# Altium PCB HallMode.PcbDoc
Units mil, origin at the board's own origin, x right, y up, seen from the top; angles counter-clockwise.
Board outline 5026.91 x 4685 mil, 2 copper layers (Top Layer, Bottom Layer); 44 components, 32 nets, 157 pads, 51 vias.
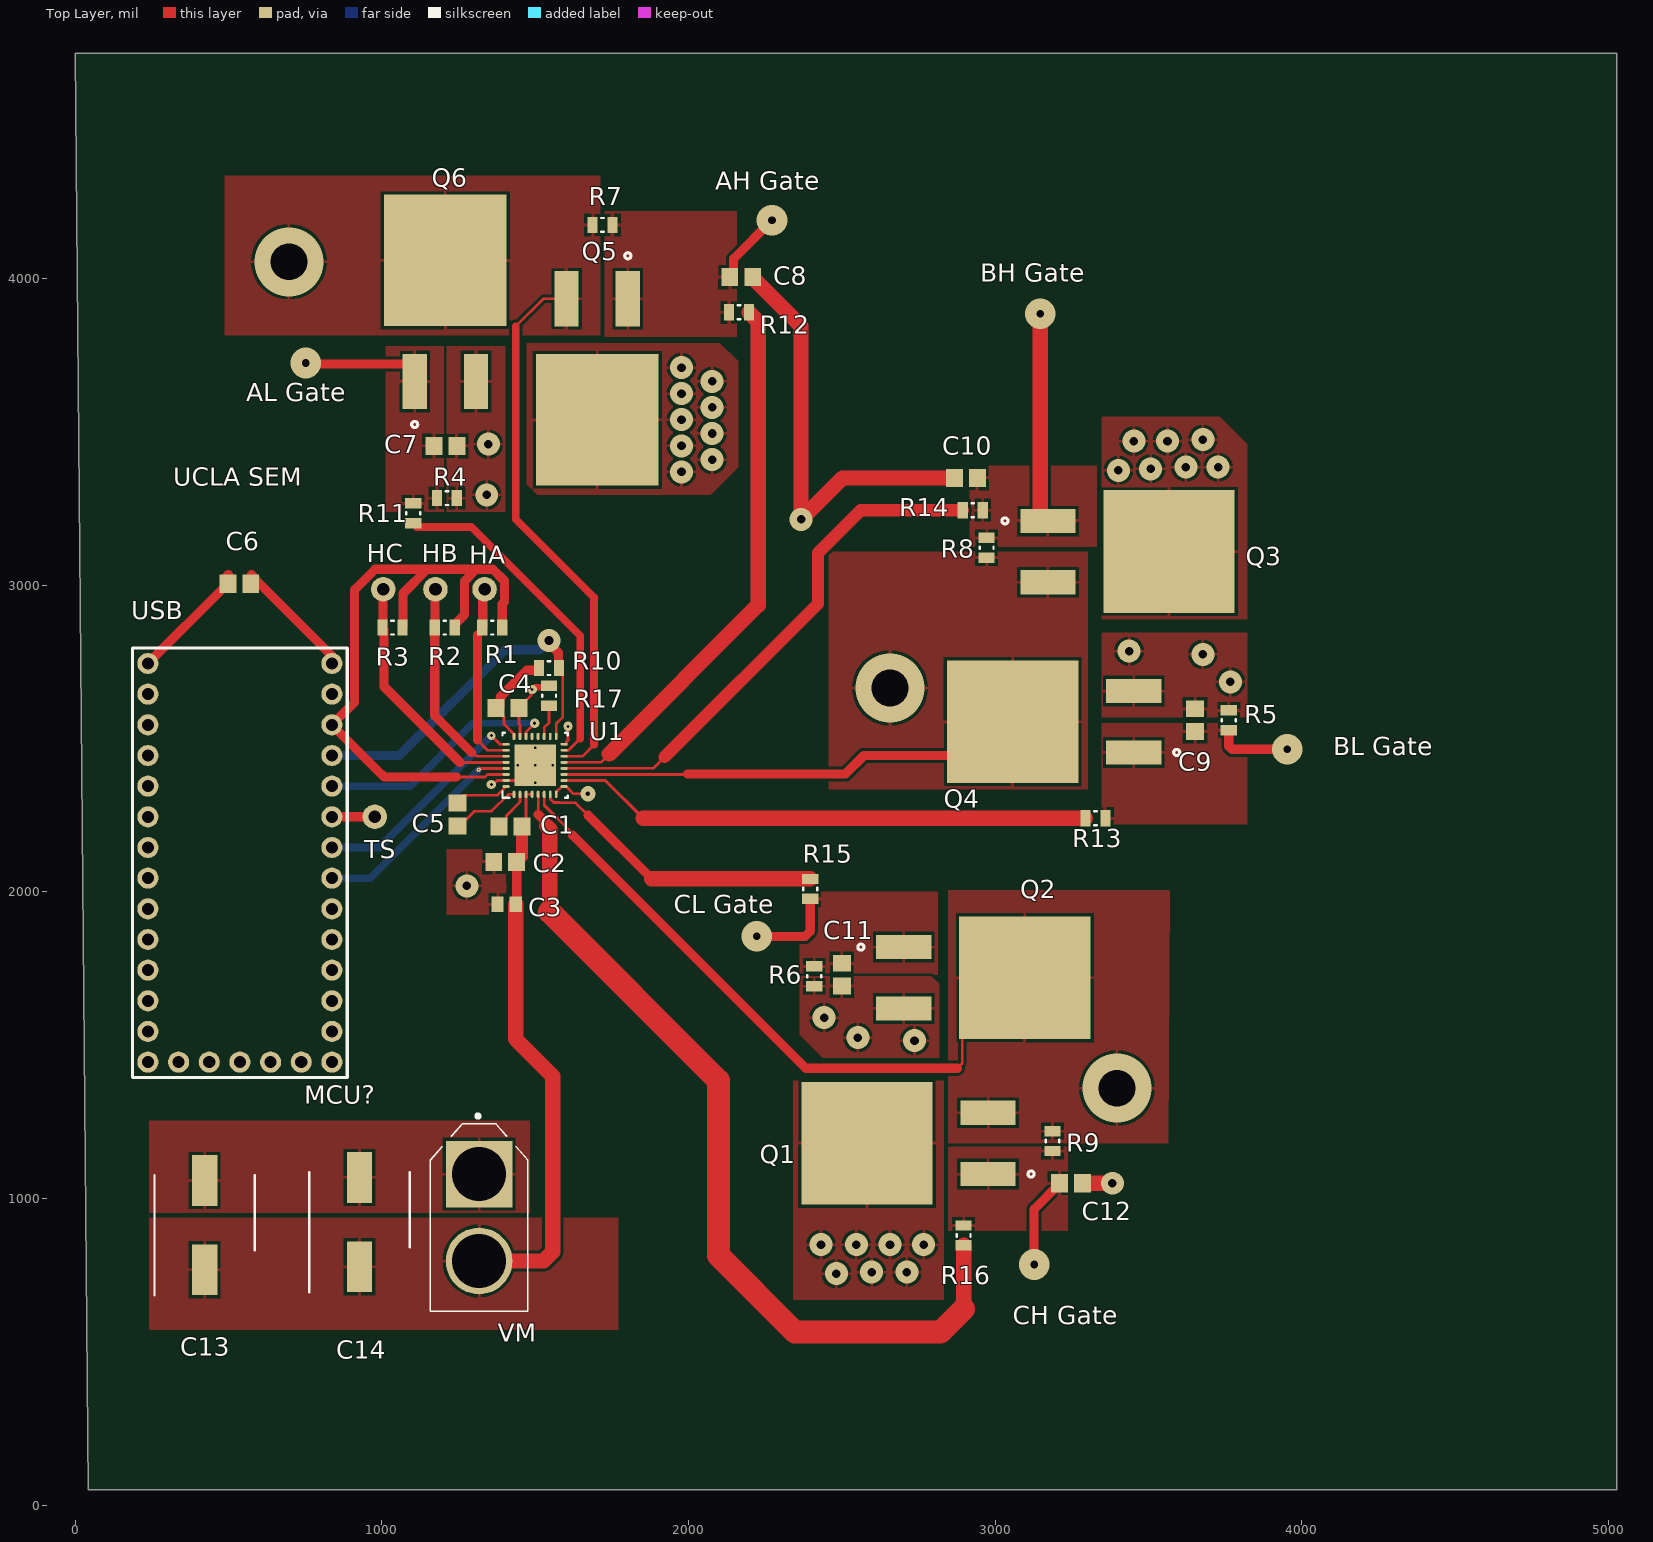
[diagram p0: Top Layer view]
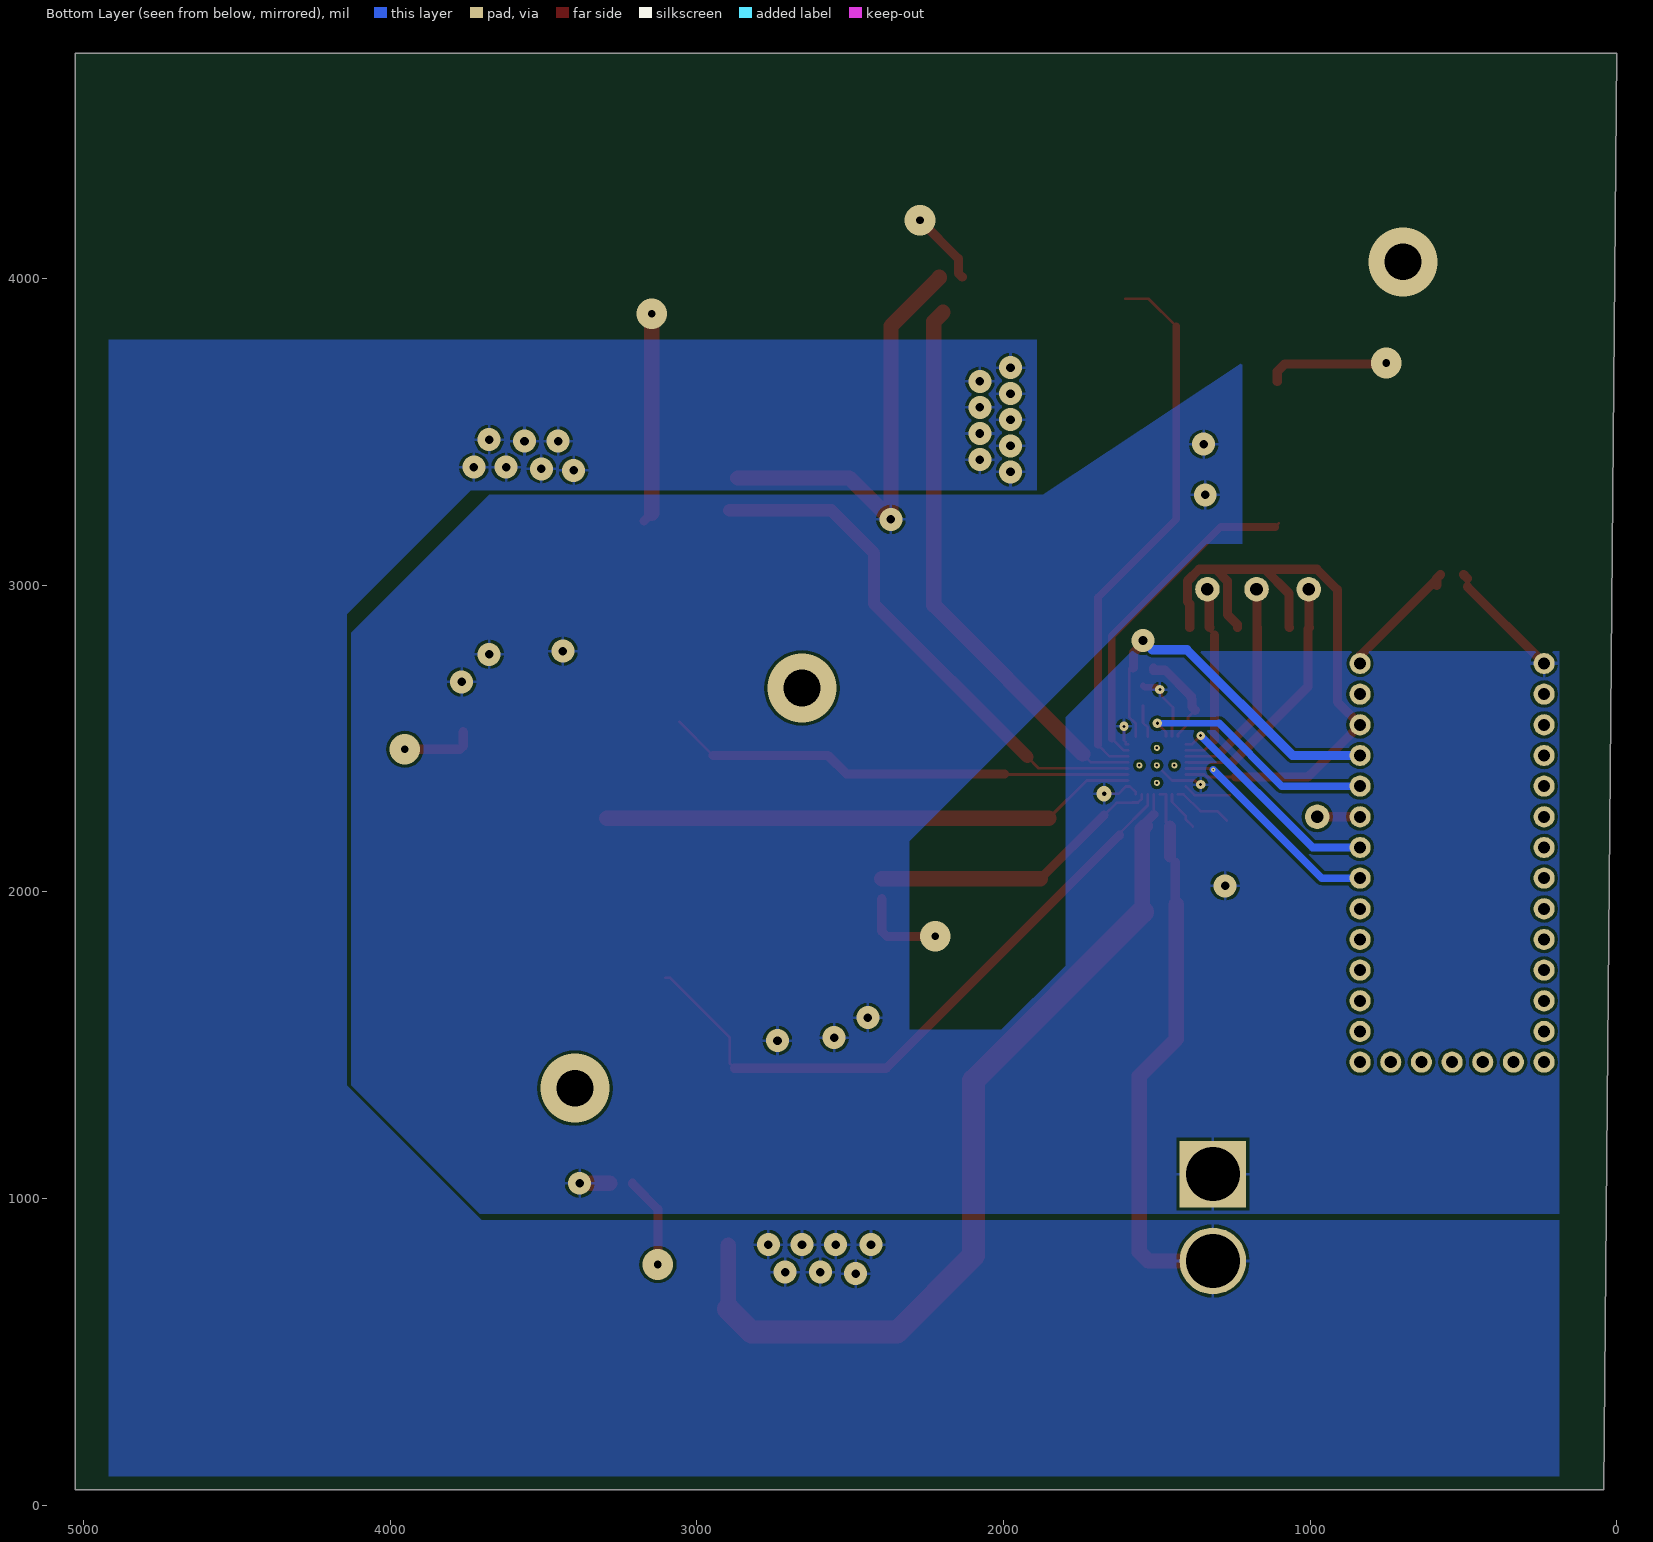
[diagram p1: Bottom Layer view, seen from below]

## Layer stack, top to bottom
Top Solder: solder mask 0.4, Solder Resist, Dk 3.5
Top Layer: signal copper 1.4
Dielectric 1: dielectric 12.6, FR-4, Dk 4.8
Bottom Layer: signal copper 1.4
Bottom Solder: solder mask 0.4, Solder Resist, Dk 3.5

## Board outline
0,4735 5026.91,4735 5026.91,1035 5026.91,50 41.91,50

## Design rules (kind name [scope] priority, off if disabled: settings)
Clearance [All] p1: gap=10 ignorepadtopadclearanceinfootprint=TRUE except(0: Arc-Hole Track-Hole SMDPad-Hole THPad-Hole Via-Hole Fill-Hole Poly-Hole Region-Hole Text-Hole)
PolygonConnect [All] p1: connectstyle=Relief reliefconductorwidth=10 reliefentries=4 polygonreliefangle="90 Angle" airgapwidth=10
RoutingVias [All] p1: holewidth=28 width=50 viastyle="Through Hole" minholewidth=28 minwidth=50 maxholewidth=28 maxwidth=50
SolderMaskExpansion [All] p1: expansion=4 istentingtop=FALSE
Width [All] p1: maxlimit=10000 minlimit=5 preferedwidth=30 bottomlayer_minwidth=10 minimp=50.000000 maximp=50.000000 favimp=50.000000
30 further rules are at their usual default settings.

## Components (designator, comment, footprint, x,y, rotation, side; value= is the part's Value field where it differs from the comment)
C1 "1uF" CAPC2013X135X45ML10T25 1419.7,2212.79 r0 top
C2 "0.1uF" CAPC2013X135X45ML10T25 1402.1,2097.79 r0 top
C3 "10uF" CAPC2013X135X50LL10T20 1406.91,1960 r0 top
C4 "1uF" CAPC2013X135X45ML10T25 1410,2600 r180 top
C5 "47nF" CAPC2013X135X45ML10T25 1246.91,2252.6 r270 top
C6 "0.1uF" CAPC2013X135X45ML10T25 535,3005 r180 top
C7 "0.1uF" CAPC2013X135X45ML10T25 1206.91,3454.48 r180 top
C8 "0.1uF" CAPC2013X135X45ML10T25 2171.91,4005 r0 top
C9 "0.1uF" CAPC2013X135X45ML10T25 3651.91,2560 r270 top
C10 "0.1uF" CAPC2013X135X45ML10T25 2904.32,3350 r180 top
C11 "0.1uF" CAPC2013X135X45ML10T25 2500,1730 r90 top
C12 "0.1uF" CAPC2013X135X45ML10T25 3246.91,1050 r0 top
C13 "EEE-TC1V101P" CAPAE830X1050N 421.91,913.27 r90 top
C14 "EEE-TC1V101P" CAPAE830X1050N 926.91,923.27 r90 top
HA "Hall Sensor" "A single pin" 1334.7,2987.21 r270 top (schematic designator "HALL A")
HB "Hall Sensor" "A single pin" 1174.7,2987.21 r270 top (schematic designator "HALL B")
HC "Hall Sensor" "A single pin" 1004.7,2987.21 r270 top (schematic designator "HALL C")
MCU? "teensy3.2" teensy3.2 836.91,2745 r270 top
Q1 "INFINEON" MOSFET-2 2761.91,1180 r0 top
Q2 "INFINEON" MOSFET-2 2916.91,1720 r180 top
Q3 "INFINEON" MOSFET-2 3386.91,3110 r180 top
Q4 "INFINEON" MOSFET-2 3236.91,2555 r0 top
Q5 "INFINEON" MOSFET-2 1701.91,3719.48 r90 top
Q6 "INFINEON" MOSFET-2 1206.91,3879.48 r270 top
R1 "CRCW08050000Z0EA" RESC2013X50X30LL20T20 1359.7,2862.21 r180 top
R2 "CRCW08050000Z0EA" RESC2013X50X30LL20T20 1204.7,2862.21 r180 top
R3 "CRCW08050000Z0EA" RESC2013X50X30LL20T20 1034.7,2862.21 r180 top
R4 "CRCW08050000Z0EA" RESC2013X50X30LL20T20 1211.91,3284.48 r180 top
R5 "CRCW08050000Z0EA" RESC2013X50X30LL20T20 3761.91,2560 r90 top
R6 "CRCW08050000Z0EA" RESC2013X50X30LL20T20 2410,1725 r90 top
R7 "CRCW08050000Z0EA" RESC2013X50X30LL20T20 1719.43,4175 r0 top
R8 "CRCW08050000Z0EA" RESC2013X50X30LL20T20 2971.91,3122.52 r90 top
R9 "CRCW08050000Z0EA" RESC2013X50X30LL20T20 3186.91,1187.48 r270 top
R10 "CRCW08050000Z0EA" RESC2013X50X30LL20T20 1545,2730 r180 top
R11 "CRCW08050000Z0EA" RESC2013X50X30LL20T20 1101.91,3235 r270 top
R12 "CRCW08050000Z0EA" RESC2013X50X30LL20T20 2164.43,3890 r0 top
R13 "CRCW08050000Z0EA" RESC2013X50X30LL20T20 3326.91,2240 r180 top
R14 "CRCW08050000Z0EA" RESC2013X50X30LL20T20 2926.91,3245 r180 top
R15 "CRCW08050000Z0EA" RESC2013X50X30LL20T20 2396.91,2010 r90 top
R16 "CRCW08050000Z0EA" RESC2013X50X30LL20T20 2896.91,880 r270 top
R17 "CRCW08050000Z0EA" RESC2013X50X30LL20T20 1545,2640 r90 top
TS "" "A single pin" 976.91,2245 r180 top
U1 "DRV8320HRTVR" RTV0032E 1499.7,2412.79 r90 top value=Value
VM "Battery" *AMASS_XT60-M 1316.91,938.27 r270 top

## Footprints (in the part's own frame and the unit in brackets; to place one, negate y for a bottom-side part, rotate by r counter-clockwise, add the part's x,y. Pads: shape width x height; smd on the part's side, far side on the other; paste and mask are expansions set on the pad)
*AMASS_XT60-M [mm]
  round 5.516 hole 4.5: 1(3.6,0)
  rect 5.516x5.516 hole 4.5: 2(-3.6,0)
  silkscreen extent -8.55,-4.05 7.75,4.05
"A single pin" [mil]
  round 80 hole 40.94: 0(0,0)
CAPAE830X1050N [mm]
  rect 4.2x2.1 smd: 1(-3.7,0) 2(3.7,0)
  silkscreen extent -5.8,-4.15 4.15,4.15, body extent -5,-4.25 5,4.25, height 10.5
CAPC2013X135X45ML10T25 [mm] "Chip Capacitor, 2-Leads, Body 2.10x1.35mm, IPC Low Density"
  rect 1.4x1.5 smd: 1(-0.95,0) 2(0.95,0)
  body extent -1.05,-0.67 1.05,0.67, height 1.35
CAPC2013X135X50LL10T20 [mm] "Chip Capacitor, 2-Leads, Body 2.00x1.25mm, IPC High Density"
  rect 1x1.3 smd: 1(-0.75,0) 2(0.75,0)
  body extent -1.05,-0.67 1.05,0.68, height 1.35
MOSFET-2 [mil]
  rect 180x78.74 smd: 1(215,-100) 3(215,100)
  rect 428.35x400 smd: 2(-180,0)
  silkscreen extent 345,-110 365,-90
RESC2013X50X30LL20T20 [mm] "Chip Resistor, 2-Leads, Body 2.00x1.25mm, IPC High Density"
  rect 0.85x1.35 smd: 1(-0.825,0) 2(0.825,0)
  silkscreen extent -0.1,-0.58 0.1,0.58, body extent -1.1,-0.72 1.1,0.72, height 0.5
RTV0032E [mm]
  oval 0.6x0.24 smd paste+0 mask+0.051: 1(-2.4,1.75) 2(-2.4,1.25) 3(-2.4,0.75) 4(-2.4,0.25) 5(-2.4,-0.25) 6(-2.4,-0.75) 7(-2.4,-1.25) 8(-2.4,-1.75) 17(2.4,-1.75) 18(2.4,-1.25) 19(2.4,-0.75) 20(2.4,-0.25) 21(2.4,0.25) 22(2.4,0.75) 23(2.4,1.25) 24(2.4,1.75)
  oval 0.24x0.6 smd paste+0 mask+0.051: 9(-1.75,-2.4) 10(-1.25,-2.4) 11(-0.75,-2.4) 12(-0.25,-2.4) 13(0.25,-2.4) 14(0.75,-2.4) 15(1.25,-2.4) 16(1.75,-2.4) 25(1.75,2.4) 26(1.25,2.4) 27(0.75,2.4) 28(0.25,2.4) 29(-0.25,2.4) 30(-0.75,2.4) 31(-1.25,2.4) 32(-1.75,2.4)
  rect 3.45x3.45 smd paste-1.712 mask+0.051: 33(0,0)
  round 0.5 hole 0.203 mask+0.051: ""(-1.45,0) ""(0,1.45) ""(0,0) ""(0,-1.45) ""(1.45,0)
  silkscreen extent -2.7,-2.7 2.7,2.7, body extent 0,0 0.25,0.25, height 0.25
teensy3.2 [mm]
  round 1.75 hole 1: 1(0,0) 2(2.54,0) 3(5.08,0) 4(7.62,0) 5(10.16,0) 6(12.7,0) 7(15.24,0) 8(17.78,0) 9(20.32,0) 10(22.86,0) 11(25.4,0) 12(27.94,0) 13(30.48,0) 14(33.02,0) 15(33.02,-2.54) 16(33.02,-5.08) 17(33.02,-7.62) 18(33.02,-10.16) 19(33.02,-12.7) 20(33.02,-15.24) 21(30.48,-15.24) 22(27.94,-15.24) 23(25.4,-15.24) 24(22.86,-15.24) 25(20.32,-15.24) 26(17.78,-15.24) 27(15.24,-15.24) 28(12.7,-15.24) 29(10.16,-15.24) 30(7.62,-15.24) 31(5.08,-15.24) 32(2.54,-15.24) 33(0,-15.24)
  silkscreen extent -1.27,-16.51 34.29,1.27

## Part data
C1 C4 C5: library part CMP-2000-04946-1, "Multilayer Ceramic Capacitor, 1 uF, +/- 10%, 16 V, -55 to 125 degC, 0805 (2012 Metric), RoHS, Tape and Reel", Capacitance=1µF, Case Size/Dimension=0805, Dielectric=X7R, Manufacturer=Murata, Package Description="2-Pin Surface Mount Device, Body 2 x 1.25 mm", Package Reference=805, Rated Voltage=16V, Tolerance (%)=±10%, Datasheet URL=https://datasheet.ciiva.com/34302/1858922-34302874.pdf, Datasheet Version=Mar-08, Manufacturer URL=http://www.murata.com/
C2 C6 C7 C8 C9 C10 C11 C12: library part CMP-2100-03644-1, "Chip Capacitor, 0.1 uF, +/- 10%, 50 V, -55 to 125 degC, 0805 (2012 Metric), RoHS, Tape and Reel", Capacitance=100nF, Case Code (Imperial)=0805, Case Code (Metric)=2012, Dielectric=X7R, Dielectric Material=Ceramic, Insulation Resistance=10GR, Manufacturer=Murata, Max Operating Temperature=125degC, Min Operating Temperature=-55degC, Package Description="2-Pin Surface Mount Device, Body 2 x 1.25 mm", Package Quantity=1, Tolerance=10%, Voltage=50V, Case/Package=0805, Datasheet URL=http://psearch.en.murata.com/capacitor/product/GRM21BR71H104KA01%23.pdf, Datasheet Version=42675.0, Depth=1.25mm, Height=1.25mm, Lead Free=LeadFree, Length=2mm, Manufacturer URL=http://www.murata.com/, Material=Ceramic, Mount=SurfaceMount, Number of Pins=2, Package Reference=0805, Packaging=TapeandReel, Radiation Hardening=No, REACH SVHC=Unknown, RoHSCompliant=true, Termination=SMD/SMT, Thickness=0.053inch, Voltage Rating=50V, Voltage Rating (DC)=50V, Width=0.049inch
C3: library part CMP-2007-03453-1, Manufacturer=Murata, Part Number=GRM21BR61C106KE15L
C13 C14: "Capacitor", Manufacturer_Name=Panasonic, Mouser Part Number=667-EEE-TC1V101P, Arrow Part Number=EEE-TC1V101P, Arrow Price/Stock=https://www.arrow.com/en/products/eee-tc1v101p/panasonic, Datasheet Link=https://www.mouser.in/datasheet/2/315/ABA0000C678-951953.pdf, Height=10.5mm, Manufacturer_Part_Number=EEE-TC1V101P, Mouser Price/Stock=https://www.mouser.com/Search/Refine.aspx?Keyword=667-EEE-TC1V101P
R1 R2 R3 R4 R5 R6 R7 R8 R9 R10 R11 R12 R13 R14 R15 R16 R17: library part CMP-2001-04896-1, Manufacturer="Vishay Dale", Part Number=CRCW08050000Z0EA
TS: library part "Hall Sensor"
U1: "No Description Available", Manufacturer="Texas Instruments", Copyright="Copyright (C) 2018 Accelerated Designs. All rights reserved", PartNumber=DRV8320HRTVR, RefDes=RefDes, Type=DEV

## Via types
v1: diameter 75, hole 28, Top Layer to Bottom Layer, 35 vias
v2: diameter 100, hole 25, Top Layer to Bottom Layer, 6 vias
v3: diameter 30, hole 10, Top Layer to Bottom Layer, 4 vias
v4: diameter 225, hole 120, Top Layer to Bottom Layer, 3 vias
v5: diameter 50, hole 15, Top Layer to Bottom Layer, 1 vias
v6: diameter 28, hole 10, Top Layer to Bottom Layer, 1 vias
v7: diameter 15, hole 5, Top Layer to Bottom Layer, 1 vias

## Nets (pads, with @x,y where several pads share a name; then routed paths per layer and width w, separated by ;. In a path a pad name is that pad's centre, name@x,y a point inside that pad or via, vN(x,y) a via of type N, cw(c..) or ccw(c..) an arc to the next point about the centre after c; other vN are vias at no path point)
+3.3: MCU?.3 R1.1 R2.1 R3.1 U1.30 | length 2243.5
  Top Layer w9: 999.34,2382.57 1007.41,2374.5 ; 1242.41,2374.5 1336.41,2374.5 1344.71,2382.8 1397.54,2382.8 1398,2383.26 U1.30
  Top Layer w30: 999.34,2382.57 MCU?.3 911.07,2619.15 911.07,2985.5 977.78,3052.21 1147.78,3052.21 ; 1007.41,2374.5 1242.41,2374.5 ; R3.1 1068.91,2863.95 1068.91,2973.35 1147.78,3052.21 ; R2.1 1237.18,2872.06 1269.7,2904.57 1269.7,3014.14 1307.78,3052.21 ; R1.1 1392.18,2939.34 1399.7,2946.86 1399.7,3014.14 1361.62,3052.21 1307.78,3052.21 ; 1147.78,3052.21 1307.78,3052.21
+5: C6.1 MCU?.1 | length 393.8
  Top Layer w30: 574.32,3035 586.87,3022.44 C6.1@586.87,3000.04 ; C6.1@586.87,3020.04 MCU?.1@836.91,2770
GND: C2.1 C3.1 C4.1 C6.2 C7.1 C8.2 C9.1 C10.2 C11.1 C12.2 C13.2 C14.2 MCU?.33 Q2.3 Q4.3 Q6.3 R4.1 R5.2 R6.1 R17.2 U1.8 U1.9 U1.16 U1.23 U1.31 U1.33 VM.2 | length 2452.1
  Top Layer w9: v3(1356.91,2350) 1362.6,2350 1376.17,2363.57 U1.31 1450.49,2363.57 U1.33@1482.49,2395.57 ; U1.23 1450.49,2543.18 1447.4,2546.27 C4.1 1447.4,2601.97 1485.98,2640.55 1485.98,2655.98 v3(1490,2660) ; U1.8 1568.6,2325.39 1587.1,2343.89 U1.9 1601.28,2343.89 1625.17,2320 v5(1671.91,2320) ; U1.16 1601.15,2481.68 1601.36,2481.89 1601.36,2488.86 1606.91,2494.41 v3(1606.91,2540)
  Top Layer w20: v3(1490,2660) 1492.71,2660 1500.04,2667.34 1539.86,2667.34 R17.2
  Top Layer w30: MCU?.33 C6.2@486.95,2995.04 ; C6.2@486.95,3022.44 499.51,3035
  Top Layer w50: C8.2 2209.32,4003.03 2366.91,3845.43 v1(2366.91,3215) 2501.91,3350 C10.2 ; C12.2 v1(3381.91,1050)
  other v1: 2736.91,1515 2551.91,1525 2441.91,1590 1276.91,2020 3766.91,2685 3676.91,2775 3436.91,2785 1341.91,3295 1346.91,3460
NetC1_1: C1.1 U1.2 | length 133.8
  Top Layer w9: C1.1 1405.36,2235.85 1405.36,2247.86 1450.49,2292.99 U1.2
NetC4_2: C4.2 R10.2 U1.24 | length 324.6
  Top Layer w9: C4.2@1374.7,2592.79 1397.76,2569.73 1397.76,2547.41 1430.8,2514.36 U1.24
  Top Layer w30: C4.2@1374.7,2592.79 1385.16,2603.24 1385.16,2630 1387.26,2632.1 1387.26,2637.26 1472.79,2722.79 1510.79,2722.79 R10.2@1510.79,2730
NetC5_1: C5.1 U1.32 | length 155.3
  Top Layer w9: C5.1@1261.91,2315 1262.41,2315.5 1376.82,2315.5 U1.32
NetC5_2: C5.2 U1.1 | length 194.4
  Top Layer w9: C5.2@1271.91,2232.6 1302.76,2263.44 1357.72,2263.44 1412.58,2318.3 U1.1
NetC7_2: C7.2 Q6.1 R4.2 R11.1 | length 399.4
  Top Layer w30: v2(751.91,3725) 755.12,3721.8 1082.54,3721.8 1106.91,3697.43 Q6.1
NetC8_1: C8.1 Q5.1 R7.2 R12.1 | length 241.9
  Top Layer w30: C8.1 2147.07,4017.56 2147.07,4065.16 v2(2271.91,4190)
NetC9_2: C9.2 Q4.1 R5.1 R13.1 | length 241.7
  Top Layer w30: R5.1@3761.91,2522.52 3761.91,2475 3771.91,2465 v2(3951.91,2465)
NetC10_1: C10.1 Q3.1 R8.2 R14.1 | length 685.4
  Top Layer w30: Q3.1@3146.91,3235 Q3.1
  Top Layer w50: Q3.1@3146.91,3235 v2(3146.91,3885)
NetC11_2: C11.2 Q2.1 R6.2 R15.1 | length 287.6
  Top Layer w30: v2(2221.91,1855) 2380,1855 2396.91,1871.91 R15.1
NetC12_1: C12.1 Q1.1 R9.2 R16.1 | length 299.2
  Top Layer w30: v2(3126.91,785) 3126.91,965.43 3209.51,1048.03 C12.1
"NetHALL A_0": HA.0 R1.2 U1.26 | length 608.6
  Top Layer w9: 1311.91,2495 1344.91,2462 U1.26 ; R1.2@1311.91,2837.06 1327.22,2852.37 R1.2
  Top Layer w30: 1311.91,2495 R1.2@1311.91,2837.06 ; R1.2 1328.95,2863.95 1328.95,2981.46 HA.0
"NetHALL B_0": HB.0 R2.2 U1.27 | length 701.4
  Top Layer w9: 1291.91,2455 1296.32,2455 1309,2442.31 U1.27
  Top Layer w30: HB.0 1173.46,2985.97 1173.46,2863.45 R2.2 1172.22,2574.69 1291.91,2455
"NetHALL C_0": HC.0 R3.2 U1.28 | length 821.3
  Top Layer w9: R3.2 R3.2@1006.91,2857.52 ; 1254.74,2422.17 1397.54,2422.17 1398,2422.63 U1.28
  Top Layer w30: R3.2 1003.46,2863.45 1003.46,2985.97 HC.0 ; R3.2@1006.91,2857.52 1006.91,2670 1254.74,2422.17
NetM_1: Q1.3 Q2.2 R9.1 U1.6 | length 2138
  Top Layer w9: U1.6 1529.31,2318.21 1529.31,2282.6 1621.91,2190 1621.91,2185 ; 2876.91,1425 2892.24,1440.33 2892.24,1524.5 3087.74,1720 Q2.2@3101.91,1720
  Top Layer w30: 1621.91,2185 2381.91,1425 2876.91,1425
  other v4: 3396.91,1360
NetM_2: Q3.3 Q4.2 R8.1 U1.11 | length 1533.9
  Top Layer w9: U1.11 1995.17,2383.26 1996.91,2385 ; Q4.2@2946.91,2445 Q4.2
  Top Layer w30: 1996.91,2385 2511.91,2385 2571.91,2445 Q4.2@2946.91,2445
  other v4: 2656.91,2665
NetM_3: Q5.3 Q6.2 R7.1 U1.14 | length 1786
  Top Layer w9: 1436.91,3845 1526.39,3934.48 Q5.3 ; U1.14 1654.23,2442.31 1691.91,2480
  Top Layer w25: 1436.91,3845 1436.91,3215 1691.91,2960 1691.91,2480
  other v4: 696.91,4055
NetMCU?_4: MCU?.4 R10.1 U1.17 | length 1196.7
  Top Layer w9: U1.17 1568.6,2549.36 1590,2570.76 R10.1@1590,2728.27
  Top Layer w30: v1(1545,2820) 1545,2810.67 1575.75,2779.93 1575.75,2731.73 R10.1
  Bottom Layer w30: MCU?.4 1056.91,2445 1401.91,2790 1515,2790 v1(1545,2820)
NetMCU?_5: MCU?.5 U1.22 | length 800.7
  Top Layer w9: U1.22 1470.26,2507.36 1470.26,2521.95 v3(1498.31,2550)
  Bottom Layer w20: 1296.91,2550 v3(1498.31,2550)
  Bottom Layer w25: MCU?.5 1091.91,2345 1296.91,2550
NetMCU?_6: MCU?.6 TS.0 | length 140
  Top Layer w30: MCU?.6 TS.0
NetMCU?_7: MCU?.7 U1.25 | length 731.2
  Top Layer w9: 1385.23,2481.68 U1.25
  Top Layer w10: v6(1356.91,2510) 1385.23,2481.68
  Bottom Layer w25: MCU?.7 991.91,2145 v6(1356.91,2510)
NetMCU?_8: MCU?.8 U1.29 | length 722.2
  Top Layer w9: v7@1311.91,2395 v7(1315.89,2398.97) 1319.86,2402.94 U1.29
  Bottom Layer w25: MCU?.8 961.91,2045 v7(1315.89,2398.97)
NetR11_2: R11.2 U1.15 | length 1100.6
  Top Layer w9: R11.2 R11.2@1114.15,3190.29 ; U1.15 1594.27,2462.09 1608.86,2462.09 1646.91,2500.14
  Top Layer w25: R11.2@1114.15,3190.29 1291.63,3190.29 1646.91,2835 1646.91,2500.14
NetR12_2: R12.2 U1.13 | length 1812.4
  Top Layer w9: U1.13 1714.54,2422.63 1741.91,2450
  Top Layer w50: 1741.91,2450 2226.91,2935 2226.91,3860 R12.2
NetR13_2: R13.2 U1.10 | length 1751.4
  Top Layer w9: U1.10 1728.34,2363.57
  Top Layer w10: 1728.34,2363.57 1851.91,2240
  Top Layer w50: 1851.91,2240 R13.2
NetR14_2: R14.2 U1.12 | length 1745.7
  Top Layer w9: U1.12 1601.4,2402.94 1601.86,2403.41 1885.32,2403.41 1921.91,2440
  Top Layer w40: 1921.91,2440 2421.91,2940 2421.91,3105 2561.91,3245 R14.2
NetR15_2: R15.2 U1.7 | length 970.8
  Top Layer w9: U1.7 1549,2318.21 1549,2303.62 1560.64,2291.99 1580.01,2291.99 1581.5,2290.5 1631.41,2290.5 1671.91,2250
  Top Layer w30: 1671.91,2250 1879.43,2042.48
  Top Layer w50: 1879.43,2042.48 R15.2
NetR16_2: R16.2 U1.5 | length 2879
  Top Layer w9: 1509.54,2262.37 U1.5
  Top Layer w30: 1509.66,2252.67 1536.91,2225.42 1536.91,2215
  Top Layer w50: 1536.91,2215 1546.91,2205 1546.91,1935 ; 2896.91,640 R16.2
  Top Layer w75: 1546.91,1935 2096.91,1385 2096.91,815 2346.91,565 2821.91,565 2896.91,640
NetR17_1: R17.1 U1.19 | length 106.8
  Top Layer w9: U1.19 1529.23,2535.6 1545,2551.37 R17.1
VDD: C1.2 C2.2 C3.2 C13.1 C14.1 Q1.2 Q3.2 Q5.2 U1.3 U1.4 VM.1 | length 1818.9
  Top Layer w9: C2.2 C2.2@1457.1,2115.39 ; C1.2 1470.17,2225.86 U1.3 U1.4
  Top Layer w30: C3.2@1439.5,1967.98 C2.2
  Top Layer w40: C2.2@1457.1,2115.39 C1.2
  Top Layer w50: VM.1 1527.62,796.54 1556.91,825.82 1556.91,1190 1556.91,1243.27 1556.91,1400 1436.44,1520.47 C3.2
  other v1: 2481.91,755 2596.91,760 2711.91,760 2431.91,850 2546.91,850 2656.91,850 2766.91,850 1976.91,3370 3401.91,3375 3506.91,3380 3621.91,3385 3726.91,3385 2076.91,3410 1976.91,3455 3451.91,3470 3561.91,3470 3676.91,3475 2076.91,3495 1976.91,3540 2076.91,3580 1976.91,3625 2076.91,3665 1976.91,3710
pads on no net: MCU?.2 MCU?.9 MCU?.10 MCU?.11 MCU?.12 MCU?.13 MCU?.14 MCU?.15 MCU?.16 MCU?.17 MCU?.18 MCU?.19 MCU?.20 MCU?.21 MCU?.22 MCU?.23 MCU?.24 MCU?.25 MCU?.26 MCU?.27 MCU?.28 MCU?.29 MCU?.30 MCU?.31 MCU?.32 U1. U1.18 U1.20 U1.21

## Polygon pours and split planes (outlines as drawn)
GND on Top Layer "GND_L01_P032" (solid, pour order 32): 1481.91,1253.27 241.91,1253.27 241.91,953.27 1481.91,953.27
VDD on Top Layer "VDD_L01_P031" (solid, pour order 31): 1771.24,936.69 241.24,936.69 241.24,576.69 236.24,571.69 1771.24,571.69
GND on Top Layer "GND_L01_P029" (solid, pour order 29): 1401.91,2140 1211.91,2140 1211.91,1925 1406.91,1925
GND on Top Layer "GND_L01_P012" (solid, pour order 12): 1211.91,3240 1211.91,3780 1401.91,3780 1401.91,3240
GND on Top Layer "GND_L01_P010" (solid, pour order 10): 2361.91,1725 2791.91,1725 2816.91,1700 2816.91,1460 2436.91,1460 2361.91,1535
GND on Top Layer "GND_L01_P008" (solid, pour order 8): 3346.91,2845 3821.91,2845 3821.91,2570 3346.91,2570
NetC10_1 on Top Layer "NETC10_1_L01_P003" (solid, pour order 3): 2916.91,3125 2916.91,3390 3331.91,3390 3331.91,3125
NetC7_2 on Top Layer "NETC7_2_L01_P017" (solid, pour order 17): 1011.91,3780 1011.91,3240 1201.91,3240 1201.91,3780
NetM_2 on Top Layer "NETM_2_L01_P002" (solid, pour order 2): 3301.91,2335.24 3301.91,3110 2801.91,3110 2456.91,3110 2456.91,2335.24
NetM_3 on Top Layer "NETM_3_L01_P004" (solid, pour order 4): 486.91,3815 1711.91,3815 1711.91,4270 1711.91,4335 486.91,4335
NetM_1 on Top Layer "NETM_1_L01_P000" (solid, pour order 0): 3569.6,2005 2846.91,2005 2846.91,1180 3256.91,1180 3564.26,1180
NetC12_1 on Top Layer "NETC12_1_L01_P030" (solid, pour order 30): 3236.91,895 3236.91,1170 2846.91,1170 2846.91,895
VDD on Top Layer "VDD_L01_P016" (solid, pour order 16): 1471.91,3790 1471.91,3330 1506.91,3295 2071.91,3295 2161.91,3385 2161.91,3730 2101.91,3790
VDD on Top Layer "VDD_L01_P015" (solid, pour order 15): 3346.91,2890 3821.91,2890 3821.91,3460 3731.91,3550 3346.91,3550
VDD on Top Layer "VDD_L01_P014" (solid, pour order 14): 2341.91,1385 2341.91,670 2831.91,670 2831.91,1385
NetC11_2 on Top Layer "NETC11_2_L01_P011" (solid, pour order 11): 2811.91,2000 2361.91,2000 2361.91,1730 2811.91,1730
NetC9_2 on Top Layer "NETC9_2_L01_P009" (solid, pour order 9): 3346.91,2220 3346.91,2550 3821.91,2550 3821.91,2220
NetC8_1 on Top Layer "NETC8_1_L01_P005" (solid, pour order 5): 1726.91,4220 1726.91,3810 2156.91,3810 2156.91,4220
GND on Bottom Layer "Bottom Layer-GND" (solid, pour order 28): 186.91,950 3716.91,950 4126.91,1360 4126.91,2845 3676.91,3295 1871.86,3295 1221.91,3725.04 1221.91,3135 1336.91,3135 2306.91,2165 2306.91,1550 2006.91,1550 1796.91,1760 1796.91,2570 1581.91,2785 186.91,2785
VDD on Bottom Layer "Bottom Layer-VDD" (solid, pour order 27): 186.91,95 4916.91,95 4916.91,3800 1891.91,3800 1891.91,3310 3736.91,3310 4141.91,2905 4141.91,1370 3701.91,930 186.91,930
no net on Bottom Layer "NONET_L02_P022" (solid, pour order 22): 4935,1260

## Silkscreen, mask and mechanical layers (free items; w line width, h text height)
Top Overlay:
  text "AH Gate" at 2086.91,4290 h60
  text "BH Gate" at 2951.91,3990 h60
  text "AL Gate" at 556.91,3600 h60
  text "UCLA SEM" at 320,3325 h60
  text "BL Gate" at 4101.91,2445 h60
  text "CL Gate" at 1951.91,1930 h60
  text "CH Gate" at 3056.91,590 h60
Mechanical 1:
  drawing of 2186 lines, arcs and shapes, not listed

## Text inside footprints (layer, text, board x,y; h text height)
MCU?: Top Overlay "USB" at 181.91,2890 h60